# Altium PCB BOARD.PcbDoc
Units mm, origin at the board's own origin, x right, y up, seen from the top; angles counter-clockwise.
Board outline 30 x 30 mm, 2 copper layers (Top Layer, Bottom Layer), stack 1.18 mm thick; 15 components, 17 nets, 53 pads, 148 vias.
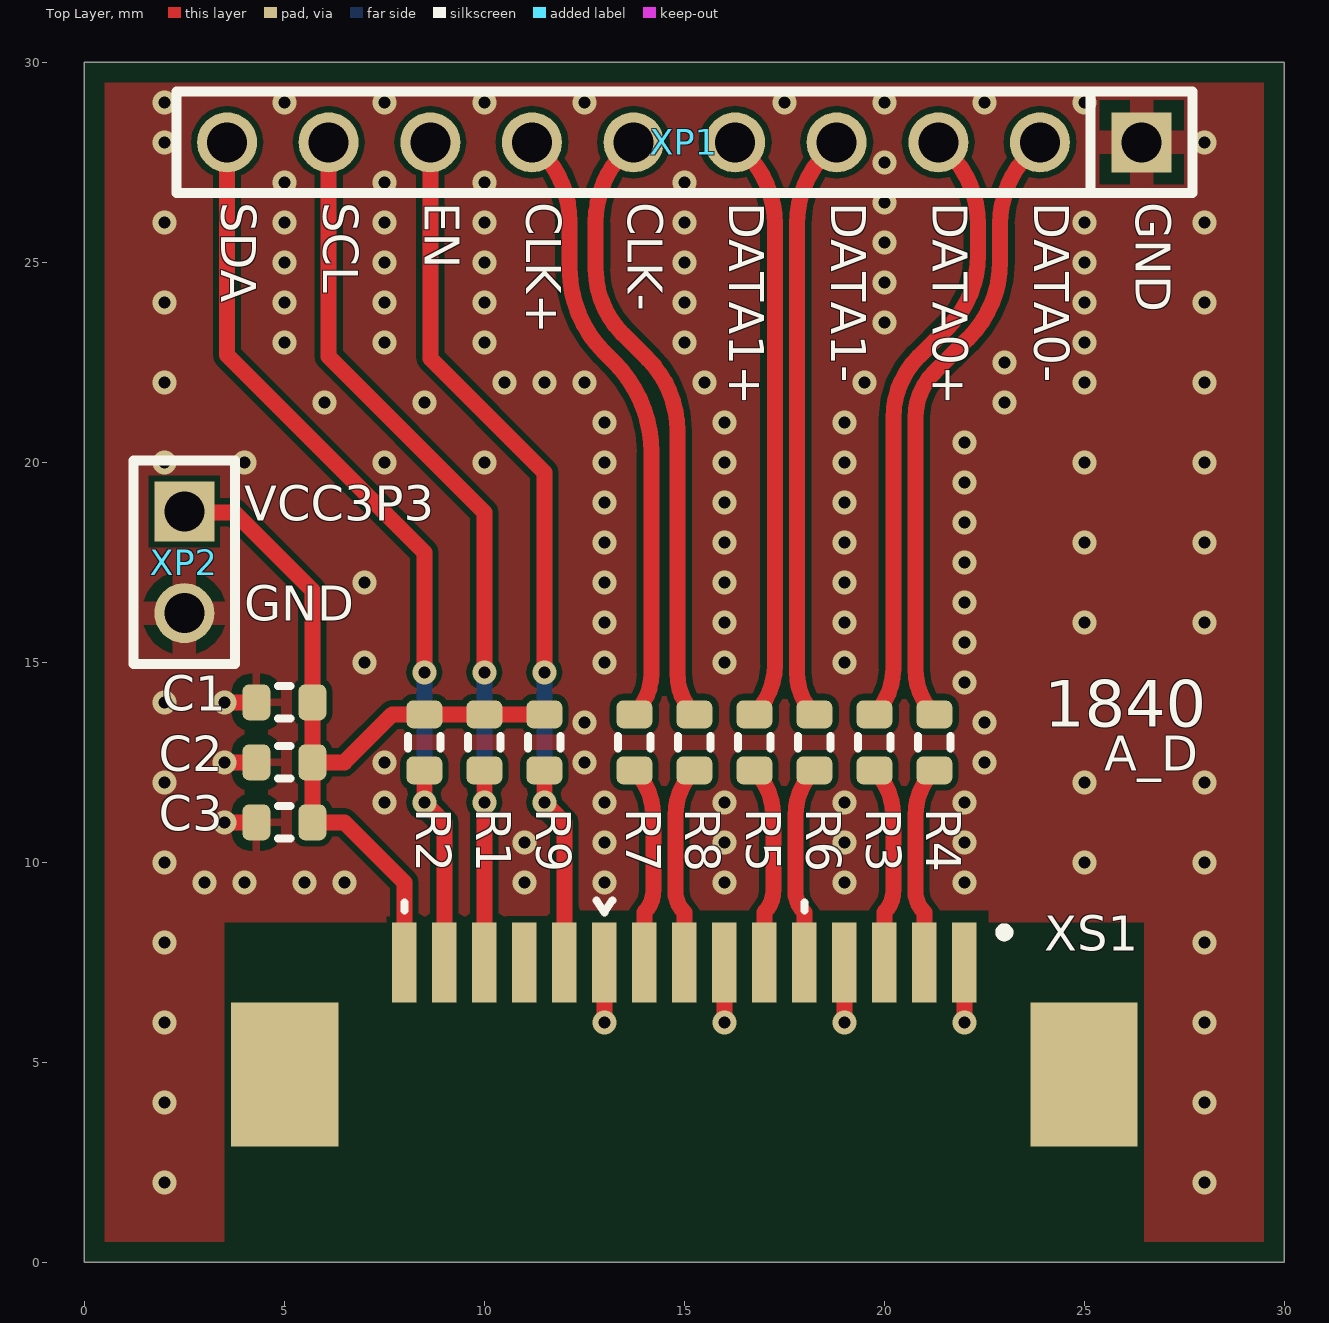
[diagram p0: Top Layer view]
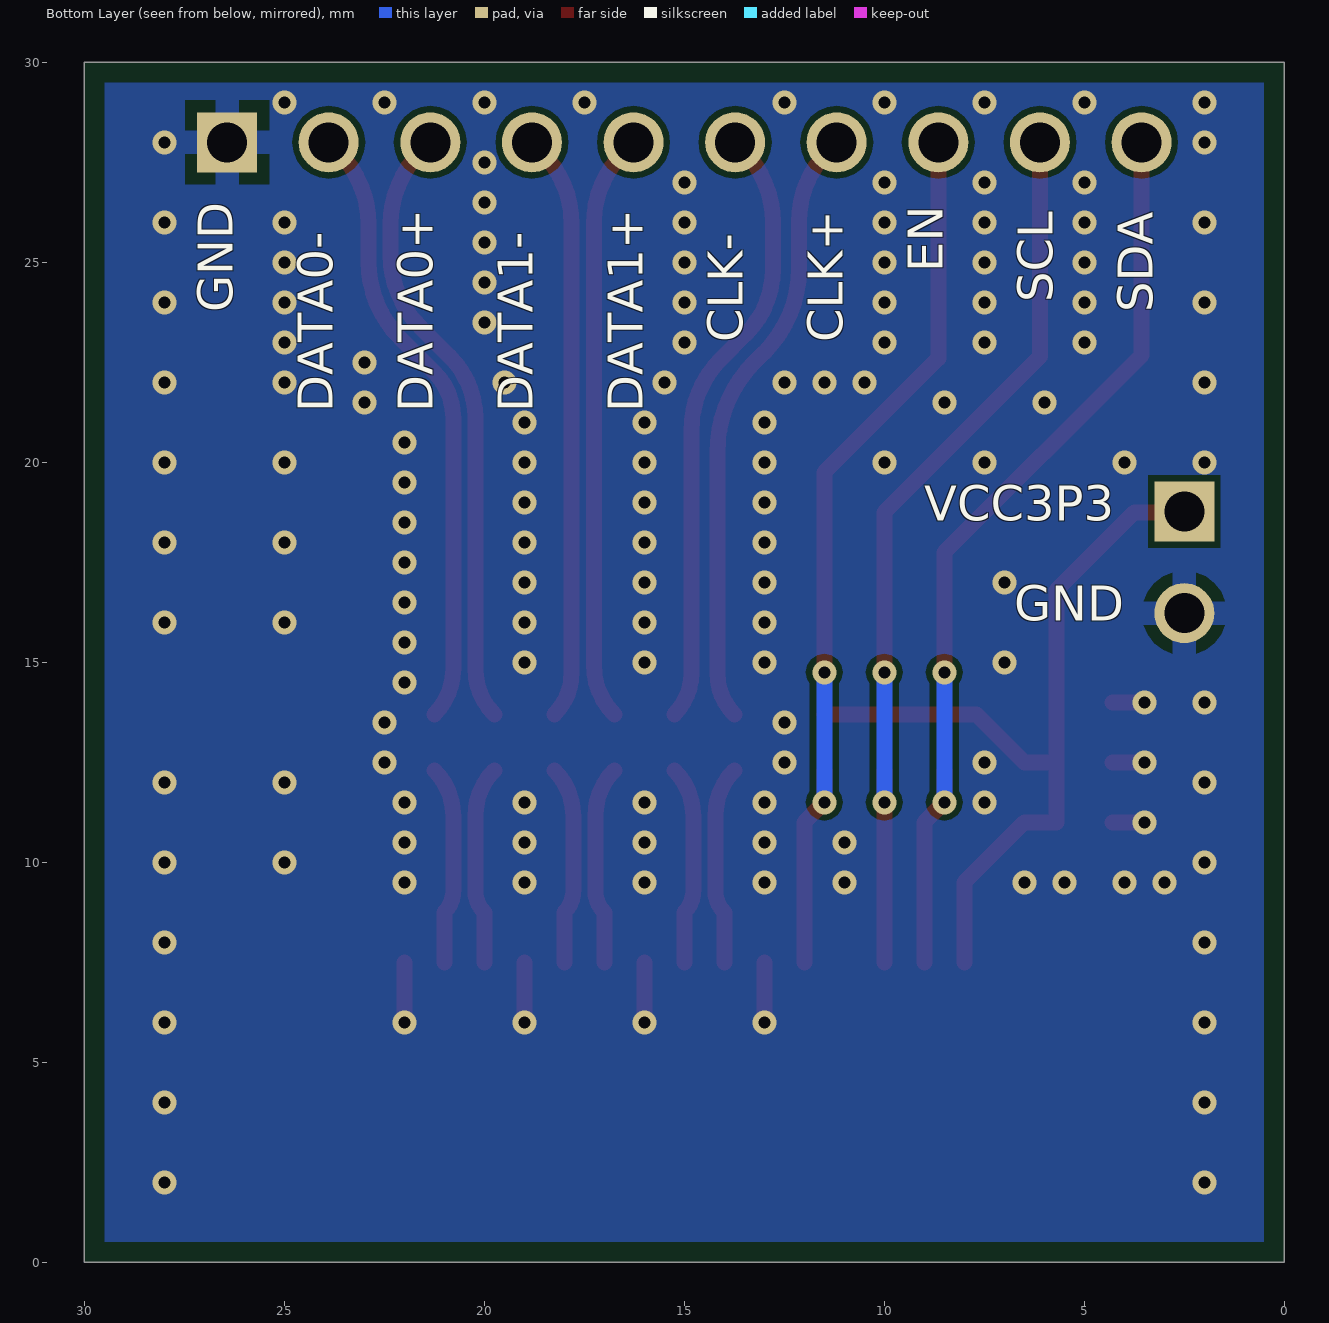
[diagram p1: Bottom Layer view, seen from below]
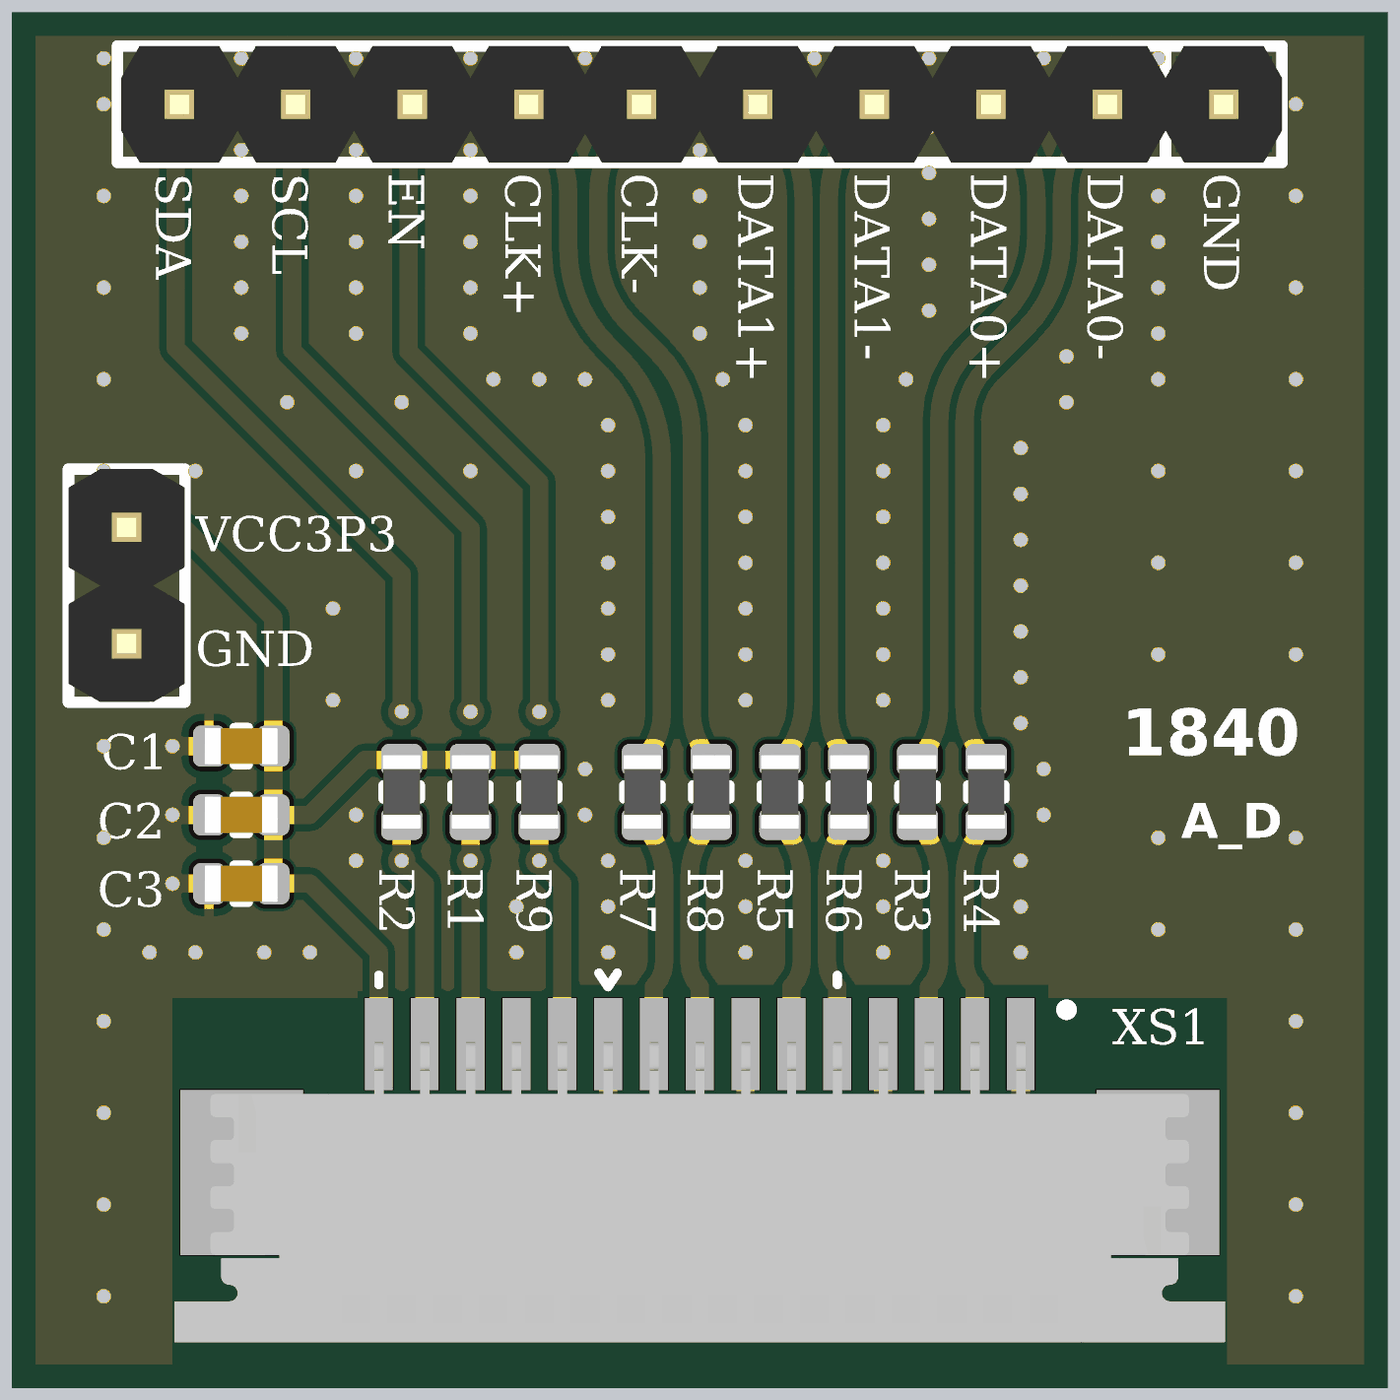
[diagram p2: 3D render of the assembled board from above, using the file's embedded part models]

## Layer stack, top to bottom
Top Solder: solder mask 0.01, Solder Resist, Dk 3.5
Top Layer: signal copper 0.03
Dielectric1: core 1.12, FR-4, Dk 4.2
Bottom Layer: signal copper 0.03
Bottom Solder: solder mask 0.01, Solder Resist, Dk 3.5

## Board outline
0,0 30,0 30,30 0,30

## Design rules (kind name [scope] priority, off if disabled: settings)
BoardOutlineClearance [All] p1: gap=0.5 ignorepadtopadclearanceinfootprint=FALSE
Clearance [All] p1: gap=0.152 ignorepadtopadclearanceinfootprint=FALSE
ComponentClearance [All] p1 off: gap=0.25 collisioncheckmode=3 verticalgap=0.25 showdistances=FALSE
DiffPairsRouting "Schematic Differential Pairs Routing_22" [InNet('MIPI_CLK_P')] p1: maxlimit=0.152 minlimit=0.152 mostfreqgap=0.152 toplayer_minwidth=0.4 toplayer_maxwidth=0.4 toplayer_prefwidth=0.4 bottomlayer_minwidth=0.4 bottomlayer_maxwidth=0.4 bottomlayer_prefwidth=0.4 maxuncoupledlength=12.7
DiffPairsRouting "Schematic Differential Pairs Routing_21" [InNet('MIPI_CLK_N')] p2: maxlimit=0.152 minlimit=0.152 mostfreqgap=0.152 toplayer_minwidth=0.4 toplayer_maxwidth=0.4 toplayer_prefwidth=0.4 bottomlayer_minwidth=0.4 bottomlayer_maxwidth=0.4 bottomlayer_prefwidth=0.4 maxuncoupledlength=12.7
DiffPairsRouting "Schematic Differential Pairs Routing_20" [InNet('MIPI_DATA1_N')] p3: maxlimit=0.152 minlimit=0.152 mostfreqgap=0.152 toplayer_minwidth=0.4 toplayer_maxwidth=0.4 toplayer_prefwidth=0.4 bottomlayer_minwidth=0.4 bottomlayer_maxwidth=0.4 bottomlayer_prefwidth=0.4 maxuncoupledlength=12.7
DiffPairsRouting "Schematic Differential Pairs Routing_19" [InNet('MIPI_DATA1_P')] p4: maxlimit=0.152 minlimit=0.152 mostfreqgap=0.152 toplayer_minwidth=0.4 toplayer_maxwidth=0.4 toplayer_prefwidth=0.4 bottomlayer_minwidth=0.4 bottomlayer_maxwidth=0.4 bottomlayer_prefwidth=0.4 maxuncoupledlength=12.7
DiffPairsRouting "Schematic Differential Pairs Routing_18" [InNet('MIPI_DATA0_P')] p5: maxlimit=0.152 minlimit=0.152 mostfreqgap=0.152 toplayer_minwidth=0.4 toplayer_maxwidth=0.4 toplayer_prefwidth=0.4 bottomlayer_minwidth=0.4 bottomlayer_maxwidth=0.4 bottomlayer_prefwidth=0.4 maxuncoupledlength=12.7
DiffPairsRouting "Schematic Differential Pairs Routing_17" [InNet('MIPI_ODATA0_N')] p6: maxlimit=0.152 minlimit=0.152 mostfreqgap=0.152 toplayer_minwidth=0.4 toplayer_maxwidth=0.4 toplayer_prefwidth=0.4 bottomlayer_minwidth=0.4 bottomlayer_maxwidth=0.4 bottomlayer_prefwidth=0.4 maxuncoupledlength=12.7
DiffPairsRouting "Schematic Differential Pairs Routing_16" [InNet('MIPI_OCLK_N')] p7: maxlimit=0.152 minlimit=0.152 mostfreqgap=0.152 toplayer_minwidth=0.4 toplayer_maxwidth=0.4 toplayer_prefwidth=0.4 bottomlayer_minwidth=0.4 bottomlayer_maxwidth=0.4 bottomlayer_prefwidth=0.4 maxuncoupledlength=12.7
DiffPairsRouting "Schematic Differential Pairs Routing_15" [InNet('MIPI_DATA0_N')] p8: maxlimit=0.152 minlimit=0.152 mostfreqgap=0.152 toplayer_minwidth=0.4 toplayer_maxwidth=0.4 toplayer_prefwidth=0.4 bottomlayer_minwidth=0.4 bottomlayer_maxwidth=0.4 bottomlayer_prefwidth=0.4 maxuncoupledlength=12.7
DiffPairsRouting "Schematic Differential Pairs Routing_14" [InNet('MIPI_ODATA1_P')] p9: maxlimit=0.152 minlimit=0.152 mostfreqgap=0.152 toplayer_minwidth=0.4 toplayer_maxwidth=0.4 toplayer_prefwidth=0.4 bottomlayer_minwidth=0.4 bottomlayer_maxwidth=0.4 bottomlayer_prefwidth=0.4 maxuncoupledlength=12.7
DiffPairsRouting "Schematic Differential Pairs Routing_13" [InNet('MIPI_ODATA1_N')] p10: maxlimit=0.152 minlimit=0.152 mostfreqgap=0.152 toplayer_minwidth=0.4 toplayer_maxwidth=0.4 toplayer_prefwidth=0.4 bottomlayer_minwidth=0.4 bottomlayer_maxwidth=0.4 bottomlayer_prefwidth=0.4 maxuncoupledlength=12.7
DiffPairsRouting "Schematic Differential Pairs Routing_12" [InNet('MIPI_ODATA0_P')] p11: maxlimit=0.152 minlimit=0.152 mostfreqgap=0.152 toplayer_minwidth=0.4 toplayer_maxwidth=0.4 toplayer_prefwidth=0.4 bottomlayer_minwidth=0.4 bottomlayer_maxwidth=0.4 bottomlayer_prefwidth=0.4 maxuncoupledlength=12.7
DiffPairsRouting "Schematic Differential Pairs Routing_5" [InNet('MIPI_OCLK_N')] p12: maxlimit=0.15 minlimit=0.15 mostfreqgap=0.15 toplayer_minwidth=0.4 toplayer_maxwidth=0.4 toplayer_prefwidth=0.4 bottomlayer_minwidth=0.4 bottomlayer_maxwidth=0.4 bottomlayer_prefwidth=0.4 maxuncoupledlength=12.7
DiffPairsRouting "Schematic Differential Pairs Routing_3" [InNet('MIPI_ODATA1_N')] p13: maxlimit=0.15 minlimit=0.15 mostfreqgap=0.15 toplayer_minwidth=0.4 toplayer_maxwidth=0.4 toplayer_prefwidth=0.4 bottomlayer_minwidth=0.4 bottomlayer_maxwidth=0.4 bottomlayer_prefwidth=0.4 maxuncoupledlength=12.7
DiffPairsRouting "Schematic Differential Pairs Routing_2" [InNet('MIPI_ODATA1_P')] p14: maxlimit=0.15 minlimit=0.15 mostfreqgap=0.15 toplayer_minwidth=0.4 toplayer_maxwidth=0.4 toplayer_prefwidth=0.4 bottomlayer_minwidth=0.4 bottomlayer_maxwidth=0.4 bottomlayer_prefwidth=0.4 maxuncoupledlength=12.7
DiffPairsRouting "Schematic Differential Pairs Routing_1" [InNet('MIPI_ODATA0_P')] p15: maxlimit=0.15 minlimit=0.15 mostfreqgap=0.15 toplayer_minwidth=0.4 toplayer_maxwidth=0.4 toplayer_prefwidth=0.4 bottomlayer_minwidth=0.4 bottomlayer_maxwidth=0.4 bottomlayer_prefwidth=0.4 maxuncoupledlength=12.7
DiffPairsRouting "Schematic Differential Pairs Routing" [InNet('MIPI_ODATA0_N')] p16: maxlimit=0.15 minlimit=0.15 mostfreqgap=0.15 toplayer_minwidth=0.4 toplayer_maxwidth=0.4 toplayer_prefwidth=0.4 bottomlayer_minwidth=0.4 bottomlayer_maxwidth=0.4 bottomlayer_prefwidth=0.4 maxuncoupledlength=12.7
DiffPairsRouting [All] p17: maxlimit=0.4 minlimit=0.15 mostfreqgap=0.25 toplayer_minwidth=0.2 toplayer_maxwidth=0.4 toplayer_prefwidth=0.25 bottomlayer_minwidth=0.2 bottomlayer_maxwidth=0.4 bottomlayer_prefwidth=0.25 maxuncoupledlength=12
Height [All] p1: minheight=0 maxheight=25 prefheight=25
HoleSize [All] p1: absolutevalues=TRUE maxlimit=6 minlimit=0.3 maxpercent=80.000 minpercent=20.000
HoleToHoleClearance [All] p1: gap=0.25 allowstackedmicrovias=TRUE
MatchedLengths "Schematic Matched Net Lengths_17" [InNet('MIPI_DATA1_N')] p1: tolerance=1 checknetsindiffpair=TRUE checkdiffpairvsdiffpair=FALSE checkxsignals=FALSE checkothers=FALSE
MatchedLengths "Schematic Matched Net Lengths_16" [InNet('MIPI_CLK_P')] p2: tolerance=1 checknetsindiffpair=TRUE checkdiffpairvsdiffpair=FALSE checkxsignals=FALSE checkothers=FALSE
MatchedLengths "Schematic Matched Net Lengths_15" [InNet('MIPI_CLK_N')] p3: tolerance=1 checknetsindiffpair=TRUE checkdiffpairvsdiffpair=FALSE checkxsignals=FALSE checkothers=FALSE
MatchedLengths "Schematic Matched Net Lengths_14" [InNet('MIPI_DATA0_N')] p4: tolerance=1 checknetsindiffpair=TRUE checkdiffpairvsdiffpair=FALSE checkxsignals=FALSE checkothers=FALSE
MatchedLengths "Schematic Matched Net Lengths_13" [InNet('MIPI_DATA0_P')] p5: tolerance=1 checknetsindiffpair=TRUE checkdiffpairvsdiffpair=FALSE checkxsignals=FALSE checkothers=FALSE
MatchedLengths "Schematic Matched Net Lengths_12" [InNet('MIPI_DATA1_P')] p6: tolerance=1 checknetsindiffpair=TRUE checkdiffpairvsdiffpair=FALSE checkxsignals=FALSE checkothers=FALSE
MatchedLengths "Schematic Matched Net Lengths_6" [InNet('MIPI_OCLK_P')] p7: tolerance=1 checknetsindiffpair=TRUE checkdiffpairvsdiffpair=FALSE checkxsignals=FALSE checkothers=FALSE
MatchedLengths "Schematic Matched Net Lengths_5" [InNet('MIPI_OCLK_N')] p8: tolerance=1 checknetsindiffpair=TRUE checkdiffpairvsdiffpair=FALSE checkxsignals=FALSE checkothers=FALSE
MatchedLengths "Schematic Matched Net Lengths_3" [InNet('MIPI_ODATA0_N')] p9: tolerance=1 checknetsindiffpair=TRUE checkdiffpairvsdiffpair=FALSE checkxsignals=FALSE checkothers=FALSE
MatchedLengths "Schematic Matched Net Lengths_2" [InNet('MIPI_ODATA1_P')] p10: tolerance=1 checknetsindiffpair=TRUE checkdiffpairvsdiffpair=FALSE checkxsignals=FALSE checkothers=FALSE
MatchedLengths "Schematic Matched Net Lengths_1" [InNet('MIPI_ODATA1_N')] p11: tolerance=1 checknetsindiffpair=TRUE checkdiffpairvsdiffpair=FALSE checkxsignals=FALSE checkothers=FALSE
MatchedLengths "Schematic Matched Net Lengths" [InNet('MIPI_ODATA0_P')] p12: tolerance=1 checknetsindiffpair=TRUE checkdiffpairvsdiffpair=FALSE checkxsignals=FALSE checkothers=FALSE
MinimumSolderMaskSliver [All] p1 off: minsoldermaskwidth=0.254
PlaneClearance [All] p1: clearance=0.5
PlaneConnect [All] p1: planeconnectstyle=Relief reliefexpansion=0.5 reliefentries=4 reliefconductorwidth=0.25 reliefairgap=0.25
PolygonConnect PolygonConnect_DirectConnect [InComponentClass('DirectConnect')] p1: connectstyle=Direct reliefconductorwidth=0.254 reliefentries=4 polygonreliefangle="90 Angle" airgapwidth=0.254
PolygonConnect PolygonConnect_Components [InComponent('C*') OR InComponent('R*') OR InComponent('NR*') OR InComponent('DA*') OR InComponent('DD*') OR InComponent('HL*')] p2: connectstyle=Relief reliefconductorwidth=0.2 reliefentries=4 polygonreliefangle="90 Angle" airgapwidth=0.25
PolygonConnect PolygonConnect_Connectors [All vs (InPadClass('All Pads'))] p3: connectstyle=Relief reliefconductorwidth=0.6 reliefentries=4 polygonreliefangle="90 Angle" airgapwidth=0.3
PolygonConnect PolygonConnect_Via [All] p4: connectstyle=Direct reliefconductorwidth=0.254 reliefentries=4 polygonreliefangle="90 Angle" airgapwidth=0.254
RoutingCorners [All] p1: cornerstyle=45-Degree minsetback=1.5 maxsetback=3.5
RoutingVias [All] p1: holewidth=0.6 width=1.2 viastyle="Through Hole" minholewidth=0.3 minwidth=0.6 maxholewidth=1 maxwidth=2
SMDEntry [All] p1: side=TRUE corner=TRUE anyangle=TRUE
SilkToSilkClearance [All] p1 off: silktosilkclearance=0.254
SilkToSolderMaskClearance [IsPad] p1 off: minsilkscreentomaskgap=0.254 clearancetoexposedcopper=TRUE
SolderMaskExpansion [All] p1: expansion=0.1
Width [All] p1: maxlimit=8 minlimit=0.2 preferedwidth=0.6
Width Width_TrackEnds [All] p2 off: maxlimit=0.25 minlimit=0.25 preferedwidth=0.25 checkconnectedcopper=TRUE
19 further rules are at their usual default settings.

## Classes and differential pairs
differential pair MIPI_ODATA1: +MIPI_ODATA1_P -MIPI_ODATA1_N
differential pair MIPI_ODATA0: +MIPI_ODATA0_P -MIPI_ODATA0_N
differential pair MIPI_OCLK: +MIPI_OCLK_P -MIPI_OCLK_N
differential pair MIPI_DATA1: +MIPI_DATA1_P -MIPI_DATA1_N
differential pair MIPI_DATA0: +MIPI_DATA0_P -MIPI_DATA0_N
differential pair MIPI_CLK: +MIPI_CLK_P -MIPI_CLK_N

## Components (designator, comment, footprint, x,y, rotation, side; value= is the part's Value field where it differs from the comment)
C1 "Capacitor" C0603_L 5,14 r0 top value=10uF
C2 "Capacitor" C0603_L 5,12.5 r0 top value=0.1uF
C3 "Capacitor" C0603_L 5,11 r0 top value=1000pF
R1 "Resistor" R0603_L 10,13 r90 top value=4.7k
R2 "Resistor" R0603_L 8.5,13 r90 top value=4.7k
R3 "Resistor" R0603_L 19.75,13 r90 top value=0
R4 "Resistor" R0603_L 21.25,13 r90 top value=0
R5 "Resistor" R0603_L 16.75,13 r90 top value=0
R6 "Resistor" R0603_L 18.25,13 r90 top value=0
R7 "Resistor" R0603_L 13.75,13 r90 top value=0
R8 "Resistor" R0603_L 15.25,13 r90 top value=0
R9 "Resistor" R0603_L 11.5,13 r90 top value=4.7k
XP1 "Text" PLS-10 15,28 r180 top value=PLS-10
XP2 "Text" PLS-2 2.5,17.5 r270 top value=PLS-2
XS1 "CAM" 1-84953-5 15,5 r180 top value=1-84953-5

## Footprints (in the part's own frame and the unit in brackets; to place one, negate y for a bottom-side part, rotate by r counter-clockwise, add the part's x,y. Pads: shape width x height; smd on the part's side, far side on the other; paste and mask are expansions set on the pad)
1-84953-5 [mm]
  rect 0.61x2 smd mask+0.025: 1(-7,-2.5) 2(-6,-2.5) 3(-5,-2.5) 4(-4,-2.5) 5(-3,-2.5) 6(-2,-2.5) 7(-1,-2.5) 8(0,-2.5) 9(1,-2.5) 10(2,-2.5) 11(3,-2.5) 12(4,-2.5) 13(5,-2.5) 14(6,-2.5) 15(7,-2.5)
  rect 2.68x3.6 smd mask+0.025: SH(-9.99,0.3) SH(9.99,0.3)
  silkscreen extent -8.1,-4.05 7,-3.15, body extent -11.46,-2.55 11.46,4, height 2.54
C0603_L [mm] "Chip Capacitor; Body 1.6 x 0.8 mm (LxW typ)"
  rrect50% 0.7x0.9 smd: 1(-0.7,0) 2(0.7,0)
  silkscreen extent -0.15,-0.41 0.15,0.41, body extent -0.8,-0.4 0.8,0.4, height 0.91
PLS-2 [mm]
  rect 1.5x1.5 hole 1: 1(-1.27,0)
  round 1.5 hole 1: 2(1.27,0)
  silkscreen extent -2.54,-1.27 2.54,1.27, body extent -2.54,-1.27 2.54,1.27, height 8.9
PLS-10 [mm]
  rect 1.5x1.5 hole 1: 1(-11.43,0)
  round 1.5 hole 1: 2(-8.89,0) 3(-6.35,0) 4(-3.81,0) 5(-1.27,0) 6(1.27,0) 7(3.81,0) 8(6.35,0) 9(8.89,0) 10(11.43,0)
  silkscreen extent -12.7,-1.27 12.7,1.27, body extent -12.7,-1.27 12.62,1.27, height 8.9
R0603_L [mm] "Chip Resistor; Body 1.6 x 0.8 mm (LxW typ)"
  rrect50% 0.7x0.9 smd: 1(-0.7,0) 2(0.7,0)
  silkscreen extent -0.15,-0.41 0.15,0.41, body extent -0.8,-0.41 0.8,0.41, height 0.46

## Part data
C1: library part GRM188R61A106KE69D, Dielectric Type=X5R, Manufacturer=Murata, Tolerance=±10%, Voltage=10V, Working Temperature Max=+85°С, Working Temperature Min=-55°С, Application Category=1, ID=173, Part Number=GRM188R61A106KE69D, Published=18.05.2010, Publisher="Andrew Danich", Type=Конденсатор
C2: library part GRM188R72A104KA35D, Dielectric Type=X7R, Manufacturer=Murata, Tolerance=±10%, Voltage=100V, Working Temperature Max=+125°С, Working Temperature Min=-55°С, Application Category=1, ID=232, Part Number=GRM188R72A104KA35D, Published=18.05.2010, Publisher="Andrew Danich", Type=Конденсатор
C3: library part GRM1885C2A102JA01D, Dielectric Type=NP0, Manufacturer=Murata, Tolerance=±5%, Voltage=100V, Working Temperature Max=+125°С, Working Temperature Min=-55°С, Application Category=1, ID=135, Part Number=GRM1885C2A102JA01D, Published=18.05.2010, Publisher="Andrew Danich", Type=Конденсатор
R1 R2 R9: library part RC0603JR-074K7L, Limit Voltage=50V, Manufacturer=Yageo, Temperature Coefficient=100ppm, Tolerance=±5%, Total Power Dissipation=0.1W, Working Temperature Max=+155°С, Working Temperature Min=-55°С, Application Category=1, ID=56, Part Number=RC0603JR-074K7L, Published=24.03.2010, Publisher="Andrew Danich", Series Type=Thick-Film, Type=Резистор
R3 R4 R5 R6 R7 R8: library part RC0603JR-070R, Limit Voltage=50V, Manufacturer=Yageo, Temperature Coefficient=100ppm, Tolerance=±5%, Total Power Dissipation=0.1W, Working Temperature Max=+155°С, Working Temperature Min=-55°С, Application Category=1, Functional Analog="RC0603FR-070RL, CR0603-J/-000E", ID=5, Part Number=RC0603JR-070R, Published=24.03.2010, Publisher="Andrew Danich", Series Type=Thick-Film, Type=Резистор
XP1: library part PLS-10, Limit Current=3A, Limit Voltage=250V, Resistance=15momh, Application Category=1, Connector Type=Male, ID=9, Part Number=PLS-10, Pins=10, Pitch=2.54mm, Published=07.03.2013, Publisher="Andrew Danich", Surface Finish=Gold, Type=Вилка
XP2: library part PLS-2, Limit Current=3A, Limit Voltage=250V, Resistance=15momh, Application Category=1, Connector Type=Male, ID=1, Part Number=PLS-2, Pins=2, Pitch=2.54mm, Published=07.03.2013, Publisher="Andrew Danich", Surface Finish=Gold, Type=Вилка
XS1: library part 1-84953-5, Limit Current=1A, Limit Voltage=200V, Manufacturer="TE Connectivity", Working Temperature Max=+85°С, Working Temperature Min=-40°С, Application Category=1, Connector Type=Female, ID=2, Part Number=1-84953-5, Pins=15, Pitch=1mm, Published=17.09.2018, Publisher="Andrew Danich", Series=FPC, Type=Розетка

## Via types
v1: diameter 0.6, hole 0.3, Top Layer to Bottom Layer, tented both sides, 148 vias

## Nets (pads, with @x,y where several pads share a name; then routed paths per layer and width w, separated by ;. In a path a pad name is that pad's centre, name@x,y a point inside that pad or via, vN(x,y) a via of type N, cw(c..) or ccw(c..) an arc to the next point about the centre after c; other vN are vias at no path point)
ENABLE: R9.1 XP1.8 XS1.11 | length 22.7
  Top Layer w0.4: XP1.8 8.65,22.6 11.5,19.75 v1(11.5,14.75) ; R9.1 v1(11.5,11.5) 12,11 XS1.11
  Bottom Layer w0.4: v1(11.5,11.5) v1(11.5,14.75)
GND: C1.1 C2.1 C3.1 XP1.1 XP2.2 XS1.1 XS1.4 XS1.7 XS1.10 | length 8.4
  Top Layer w0.4: v1(3.5,11) C3.1 ; v1(3.5,12.5) C2.1 ; v1(3.5,14) C1.1 ; v1(13,6) XS1.10 ; v1(16,6) XS1.7 ; v1(19,6) XS1.4 ; v1(22,6) XS1.1
  other v1: 2,2 28,2 2,4 28,4 2,6 28,6 2,8 28,8 3,9.5 4,9.5 5.5,9.5 6.5,9.5 11,9.5 13,9.5 16,9.5 19,9.5 22,9.5 2,10 25,10 28,10 11,10.5 13,10.5 16,10.5 19,10.5 22,10.5 7.5,11.5 13,11.5 16,11.5 19,11.5 22,11.5 2,12 25,12 28,12 7.5,12.5 12.5,12.5 22.5,12.5 12.5,13.5 22.5,13.5 2,14 22,14.5 7,15 13,15 16,15 19,15 22,15.5 13,16 16,16 19,16 25,16 28,16 22,16.5 7,17 13,17 16,17 19,17 22,17.5 13,18 16,18 19,18 25,18 28,18 22,18.5 13,19 16,19 19,19 22,19.5 2,20 4,20 7.5,20 10,20 13,20 16,20 19,20 25,20 28,20 22,20.5 13,21 16,21 19,21 6,21.5 8.5,21.5 23,21.5 2,22 10.5,22 11.5,22 12.5,22 15.5,22 19.5,22 25,22 28,22 23,22.5 5,23 7.5,23 10,23 15,23 25,23 20,23.5 2,24 5,24 7.5,24 10,24 15,24 25,24 28,24 20,24.5 5,25 7.5,25 10,25 15,25 25,25 20,25.5 2,26 5,26 7.5,26 10,26 15,26 25,26 28,26 20,26.5 5,27 7.5,27 10,27 15,27 20,27.5 2,28 28,28 2,29 5,29 7.5,29 10,29 12.5,29 17.5,29 20,29 22.5,29 25,29
I2C_SCL: R1.1 XP1.9 XS1.13 | length 22.9
  Top Layer w0.4: XP1.9 6.11,22.64 10,18.75 v1(10,14.75) ; XS1.13 R1.1
  Bottom Layer w0.4: v1(10,11.5) v1(10,14.75)
I2C_SDA: R2.1 XP1.10 XS1.14 | length 23.5
  Top Layer w0.4: XP1.10 3.57,22.68 8.5,17.75 v1(8.5,14.75) ; R2.1 v1(8.5,11.5) 9,11 XS1.14
  Bottom Layer w0.4: v1(8.5,11.5) v1(8.5,14.75)
MIPI_CLK_N: R8.1 XS1.8 | length 5
  Top Layer w0.4: XS1.8 15,8.75 cw(c15.54,9.29) 14.776,9.29 14.776,11.156 cw(c16.394,11.156) R8.1
MIPI_CLK_P: R7.1 XS1.9 | length 5
  Top Layer w0.4: R7.1 cw(c12.606,11.156) 14.224,11.156 14.224,9.29 cw(c13.46,9.29) 14,8.75 XS1.9
MIPI_DATA0_N: R4.1 XS1.2 | length 5
  Top Layer w0.4: XS1.2 21,8.75 cw(c21.54,9.29) 20.776,9.29 20.776,11.156 cw(c22.394,11.156) R4.1
MIPI_DATA0_P: R3.1 XS1.3 | length 5
  Top Layer w0.4: R3.1 cw(c18.606,11.156) 20.224,11.156 20.224,9.29 cw(c19.46,9.29) 20,8.75 XS1.3
MIPI_DATA1_N: R6.1 XS1.5 | length 5
  Top Layer w0.4: XS1.5 18,8.75 cw(c18.54,9.29) 17.776,9.29 17.776,11.156 cw(c19.394,11.156) R6.1
MIPI_DATA1_P: R5.1 XS1.6 | length 5
  Top Layer w0.4: R5.1 cw(c15.606,11.156) 17.224,11.156 17.224,9.29 cw(c16.46,9.29) 17,8.75 XS1.6
MIPI_OCLK_N: R8.2 XP1.6 | length 15.3
  Top Layer w0.4: XP1.6 13.529,27.799 ccw(c15.325,26.003) 12.785,26.003 12.785,24.838 ccw(c15.088,24.838) 13.46,23.21 14.081,22.588 cw(c12.285,20.792) 14.825,20.792 14.825,14.726 ccw(c16.276,14.726) R8.2
MIPI_OCLK_P: R7.2 XP1.7 | length 15.3
  Top Layer w0.4: XP1.7 11.391,27.799 cw(c9.595,26.003) 12.135,26.003 12.135,24.838 ccw(c15.088,24.838) 13,22.75 13.241,22.509 cw(c10.985,20.254) 14.175,20.254 14.175,14.726 cw(c12.724,14.726) R7.2
MIPI_ODATA0_N: R4.2 XP1.2 | length 15.4
  Top Layer w0.4: R4.2 cw(c22.394,14.844) 20.776,14.844 20.776,21.106 cw(c22.394,21.106) 21.25,22.25 22.101,23.101 ccw(c20.18,25.021) 22.896,25.021 22.896,25.954 cw(c25.436,25.954) 23.64,27.75 XP1.2
MIPI_ODATA0_P: R3.2 XP1.3 | length 15.4
  Top Layer w0.4: R3.2 ccw(c18.606,14.844) 20.224,14.844 20.224,21.106 cw(c22.394,21.106) 20.859,22.641 21.6,23.381 ccw(c19.804,25.177) 22.344,25.177 22.344,25.954 ccw(c19.804,25.954) 21.6,27.75 XP1.3
MIPI_ODATA1_N: R6.2 XP1.4 | length 14.7
  Top Layer w0.4: R6.2 cw(c19.297,14.747) 17.816,14.747 17.816,25.954 cw(c20.356,25.954) 18.56,27.75 XP1.4
MIPI_ODATA1_P: R5.2 XP1.5 | length 14.7
  Top Layer w0.4: XP1.5 16.52,27.75 cw(c14.724,25.954) 17.264,25.954 17.264,14.94 cw(c15.51,14.94) R5.2
VCC3P3: C1.2 C2.2 C3.2 R1.2 R2.2 R9.2 XP2.1 XS1.15 | length 21
  Top Layer w0.4: XP2.1 2.52,18.75 3.75,18.75 5.7,16.8 C1.2 C2.2 ; XS1.15 8,9.5 6.5,11 C3.2 C2.2 ; R9.2 R1.2 R2.2 7.7,13.7 6.5,12.5 C2.2
pads on no net: XS1.12 XS1.SH

## Polygon pours and split planes (outlines as drawn)
GND on Bottom Layer (solid, remove dead copper, pour order 0): 0,30 30,30 30,0 0,0
GND on Top Layer (solid, remove dead copper, pour order 2): 0,30 30,30 30,0 0,0

## Other copper
Top Layer:
  pour cut-out: 3.5,0 3.5,8.5 26.5,8.5 26.5,0

## Silkscreen, mask and mechanical layers (free items; w line width, h text height)
Top Overlay:
  text "SDA" at 3.14,26.5 h1.5 r270
  text "SCL" at 5.68,26.5 h1.5 r270
  text "EN" at 8.22,26.5 h1.5 r270
  text "CLK+" at 10.76,26.5 h1.5 r270
  text "CLK-" at 13.3,26.5 h1.5 r270
  text "DATA1+" at 15.84,26.5 h1.5 r270
  text "DATA1-" at 18.38,26.5 h1.5 r270
  text "DATA0+" at 20.92,26.5 h1.5 r270
  text "DATA0-" at 23.46,26.5 h1.5 r270
  text "GND" at 26,26.5 h1.5 r270
  text "VCC3P3" at 4,18.25 h1.5
  text "GND" at 4,15.75 h1.5
  text "1840" at 24,13 h2
  text "A_D" at 25.5,12 h1.5
Bottom Overlay:
  text "EN" at 8.25,24.75 h1.5 r270
  text "SCL" at 5.5,24 h1.5 r270
  text "SDA" at 3,23.75 h1.5 r270
  text "GND" at 26,23.75 h1.5 r270
  text "CLK+" at 10.75,23 h1.5 r270
  text "CLK-" at 13.25,23 h1.5 r270
  text "DATA1+" at 15.75,21.25 h1.5 r270
  text "DATA1-" at 18.5,21.25 h1.5 r270
  text "DATA0+" at 21,21.25 h1.5 r270
  text "DATA0-" at 23.5,21.25 h1.5 r270
  text "VCC3P3" at 9,18.25 h1.5
  text "GND" at 6.75,15.75 h1.5
1 - Board Outline:
  the board outline again, w0.1